# Altium PCB FlightController.PcbDoc (part 2 of 2)
Units mm, origin at the board's own origin, x right, y up, seen from the top; angles counter-clockwise.
Board outline 33 x 33 mm, 4 copper layers (Top Layer, Layer 2, Layer 3, Bottom Layer), stack 0.603 mm thick; 72 components, 55 nets, 323 pads, 114 vias.
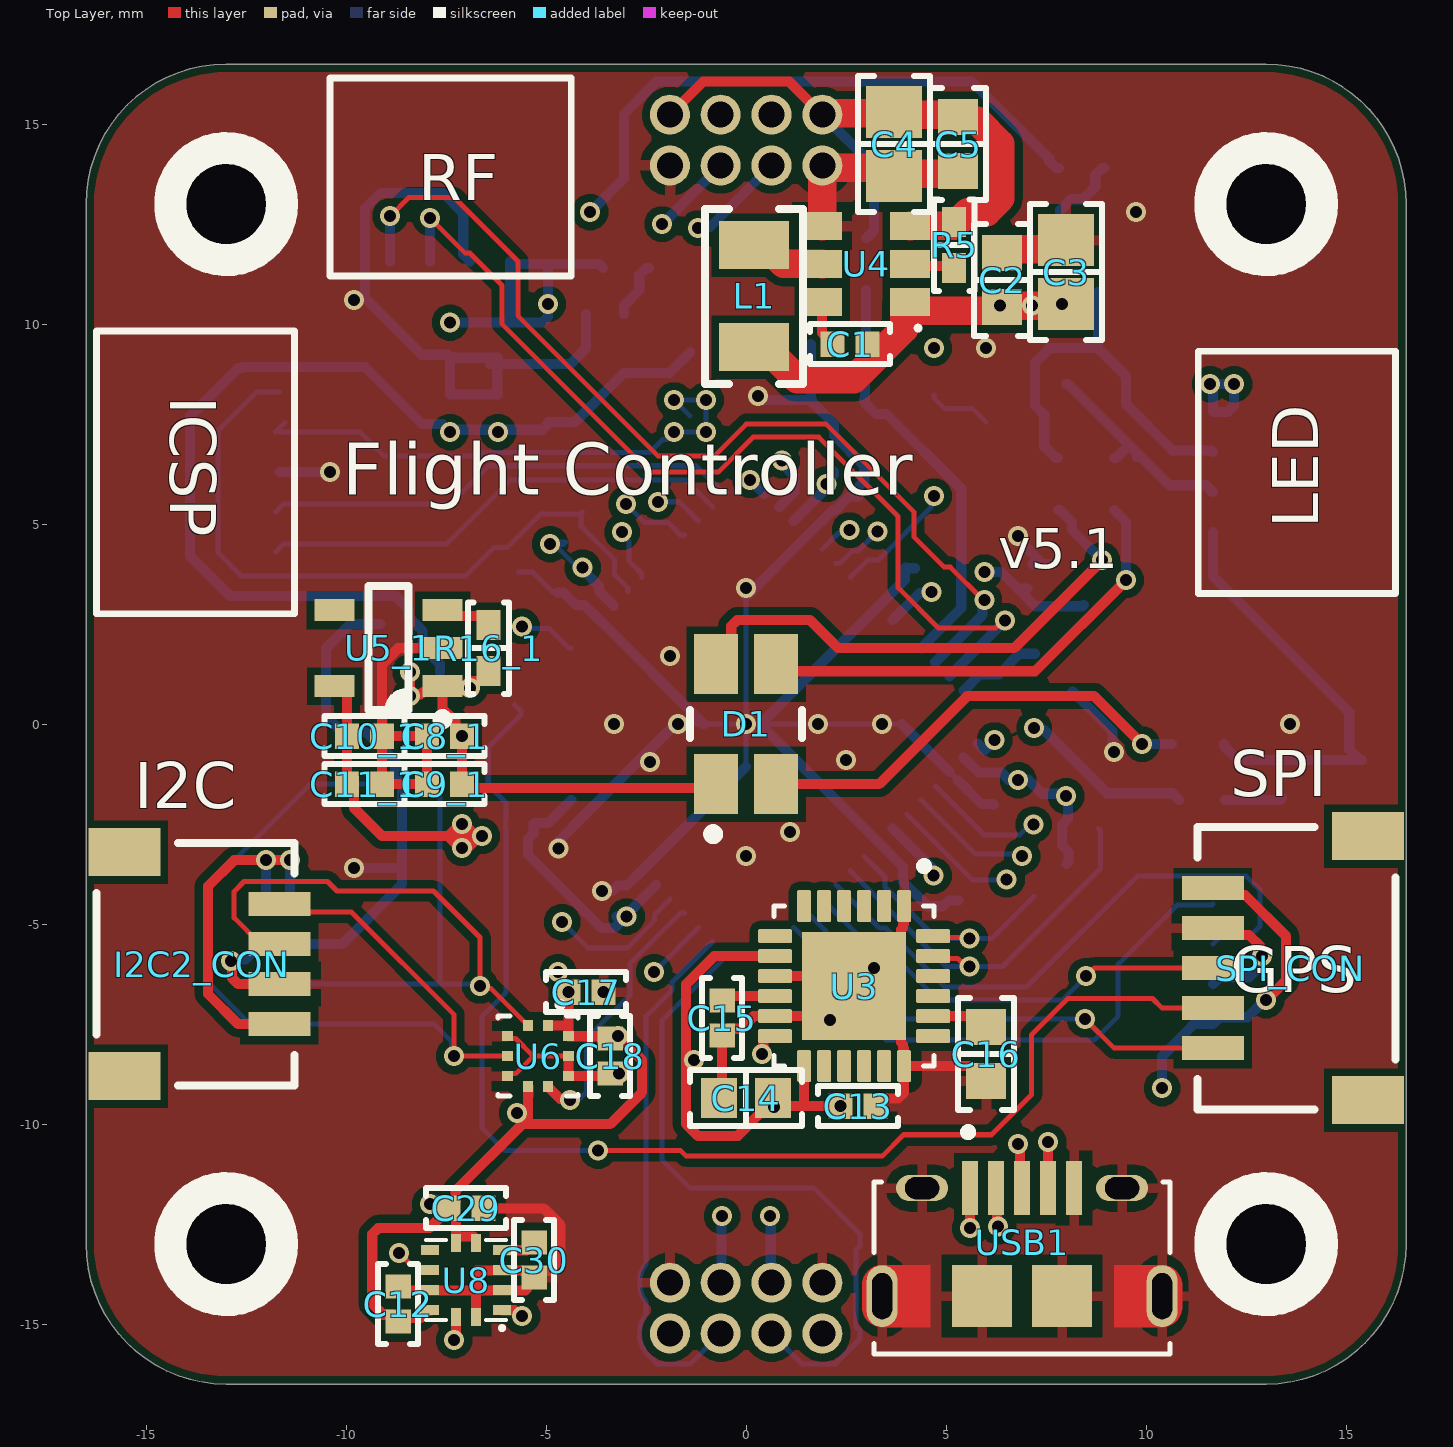
[diagram p0: Top Layer view]

## Via types
v1: diameter 0.5, hole 0.3, Top Layer to Bottom Layer, tented both sides, 114 vias

## Nets (pads, with @x,y where several pads share a name; then routed paths per layer and width w, separated by ;. In a path a pad name is that pad's centre, name@x,y a point inside that pad or via, vN(x,y) a via of type N, cw(c..) or ccw(c..) an arc to the next point about the centre after c; other vN are vias at no path point) (continued)
I2C.SDA: (continued)
  Bottom Layer w0.127: U7.3 -10.9,-1.5 -13.4,-4 -13.4,-6.5 -12.4,-7.5 -7.8,-7.5 -7.362,-7.938 -7.362,-8.238 v1(-7.3,-8.3) ; U1.41 3.469,-3.823 3.469,-4.069 4.76,-5.36 v1(5.587,-5.36) ; v1@5.623,-5.323 5.66,-5.36 6.14,-5.36 R1.1
INT.INT_LIS3: U1.53 U8.8 | length 15.6
  Top Layer w0.127: v1(-8.68,-13.225) -8.67,-13.225 -8.399,-13.496 -8.271,-13.496 -8.179,-13.588 -7.962,-13.588 U8.8
  Layer 2 w0.127: v1(-8.68,-13.225) -8.68,-7.08 -6.548,-4.948 v1(-4.6,-4.948)
  Bottom Layer w0.127: v1(-4.6,-4.948) -3.948,-5.6 -2.981,-5.6 -2.287,-4.906 -2.287,-4.762 U1.53
INT.INT_MPU: U1.51 U3.12 | length 5.9
  Top Layer w0.254: v1(0.4,-8.25) 0.428,-8.222 0.428,-7.848 0.476,-7.8 U3.12
  Layer 2 w0.127: v1(-2.3,-6.2) -1.65,-6.2 v1(0.4,-8.25)
  Bottom Layer w0.127: v1(-2.3,-6.2) -2.3,-6.195 -1.191,-5.086 U1.51
MCLR: C25.1 ICSP.1 R11.1 U1.9 | length 17.4
  Bottom Layer w0.127: ICSP.1 -12.243,8.3 -13.2,7.343 -13.2,4.284 -12.616,3.7 -7.022,3.7 C25.1 -5.977,4.411 -5.134,5.254 -4.146,5.254 R11.1@-4.123,5.277 ; R11.1 R11.1@-4.123,5.277 ; U1.9 -2.959,3.407 -3.287,3.735 -3.287,4.106 -4.123,4.942 R11.1@-4.123,5.277
MCU_VDD: C7.2 C20.2 C21.2 C22.2 C23.2 C24.2 C26.2 C27.2 FB1.2 ICSP.2 R1.2 R2.2 R11.2 U1.8 U1.19 U1.26 U1.34 U1.39 U1.54 U1.60 Y1.4 | length 35.8
  Bottom Layer w0.127: ICSP.2@-11.768,7.3 ICSP.2@-11.532,7.536 ; ICSP.2 -9.65,7.3 -9.05,6.7 -6.662,6.7 -6.576,6.786 -2.414,6.786 -2.087,7.114 -1.986,7.114 v1(-1.8,7.3) -1.2,7.3 -1.1,7.4 v1(-1,7.3) v1(-1,8.1) v1(-1.8,8.1) FB1.2 ; R11.2@-4.671,4.493 -4.572,4.493 -4.519,4.546 -4.718,4.546 -4.771,4.493 R11.2 v1(-4.9,4.5) -4.8,4.5 -4.211,3.911 v1(-4.089,3.911)
  Bottom Layer w0.254: U1.60 -4.95,-2.475 -5.297,-2.475 C22.2 -5.311,-2.734 -5.454,-2.877 -5.454,-3.261 -3.615,-5.1 -3.3,-5.1 C21.2@-3.011,-4.811 ; v1(-4.089,3.911) -4.089,3.866 -3.682,3.46 -3.682,3.333 -3.313,2.963 U1.8 ; C21.2@-3.234,-4.811 C21.2@-3.011,-4.811 ; U1.54 -2.774,-4.542 -2.774,-4.552 -2.889,-4.666 -2.889,-4.711 v1(-2.989,-4.811) C21.2@-3.011,-4.811 ; U1.19 1.966,5.856 1.966,5.953 v1(2.013,6) ; v1@2,6 2,6.053 2.189,6.242 C7.2 ; U1.39 3.666,-2.61 4.689,-3.632 v1(4.689,-3.789) ; U1.26 4.335,3.275 4.597,3.275 v1(4.629,3.307) ; U1.34 5.438,-0.838 5.808,-1.207 6.385,-1.207 6.566,-1.389 C23.2 ; v1(5.954,3.802) 6.376,3.802 C27.2 ; v1(6.8,-1.4) C23.2 ; C27.2@7.034,3.389 C27.2 ; v1(8,-1.8) R2.2 ; R1.2 8.06,-3.44 8.06,-3.196 7.9,-3.036 7.9,-2.52 8.046,-2.374 8.046,-1.846 R2.2 ; Y1.4 8.406,2.947 7.231,2.947 C27.2 ; C23.2 7.056,-1.389 7.407,-1.74 7.94,-1.74 R2.2
NetC1_1: C1.1 U4.6 | length 1.2
  Top Layer w0.254: U4.6 1.9,9.78 2.16,9.52 C1.1
NetC15_1: C15.1 U3.10 | length 1.4
  Top Layer w0.254: C15.1 -0.49,-6.8 U3.10
NetC16_1: C16.1 U3.20 | length 1.4
  Top Layer w0.254: U3.20 5.725,-7.3 C16.1
NetC30_1: C30.1 U8.4 | length 0.9
  Top Layer w0.254: U8.4@-6.085,-13.157 -6.083,-13.155 -5.493,-13.155 -5.305,-12.967 C30.1@-5.285,-12.967
NetD1_2: D1.2 R8.2 | length 11.3
  Top Layer w0.254: D1.2 3.325,-1.5 5.525,0.7 8.7,0.7 v1(9.9,-0.5)
  Bottom Layer w0.254: v1(9.9,-0.5) R8.2
NetD1_3: D1.3 R10.2 | length 11.6
  Top Layer w0.254: D1.3 0.927,1.323 7.223,1.323 v1(9.5,3.6)
  Bottom Layer w0.254: R10.2 9.202,5.35 9.5,5.052 v1(9.5,3.6)
NetD1_4: D1.4 R12.2 | length 13.4
  Top Layer w0.254: D1.4 -0.37,1.88 -0.37,2.451 -0.222,2.6 1.6,2.6 2.3,1.9 6.7,1.9 v1(8.9,4.1)
  Bottom Layer w0.254: R12.2 7.85,5.35 8.148,5.052 8.148,4.852 v1(8.9,4.1)
NetL1_1: L1.1 U4.5 | length 1.9
  Top Layer w0.712: L1.1 0.475,11.975 0.944,11.506 1.894,11.506 U4.5
NetM1_1: M1.1 R9.1 | length 1.4
  Bottom Layer w0.254: R9.1 12.05,-1.9 13.35,-1.9 M1.1
NetM2_1: M2.1 R13.1 | length 1.6
  Bottom Layer w0.127: R13.1 4.7,8.15 4.963,7.887 5.663,7.887 M2.1
NetM3_1: M3.1 R14.1 | length 1.8
  Bottom Layer w0.254: M3.1 7.85,12.85 8.123,13.123 8.423,13.123 8.727,13.427 8.727,13.727 8.9,13.9 R14.1@8.962,13.9
NetR5_2: R5.2 U4.2 | length 1.1
  Top Layer w0.254: U4.2 4.15,11.45 5.15,11.45 R5.2
NetR16_1_1: R16_1.1 U5_1.3 | length 1.3
  Top Layer w0.254: U5_1.3 -7.442,2.702 -6.613,2.702 -6.44,2.529 R16_1.1
NetR16_2_1: R16_2.1 U5_2.3 | length 1.5
  Bottom Layer w0.254: U5_2.3 -3.05,10.475 -2.673,10.852 -2.673,11.227 -2.5,11.4 R16_2.1
OSC: U1.31 Y1.3 | length 2.2
  Bottom Layer w0.254: U1.31 5.438,0.838 5.848,1.248 6.321,1.248 6.832,1.759 Y1.3
PGC: ICSP.5 U1.15 | length 12
  Bottom Layer w0.127: ICSP.5@-11.768,4.3 -11.568,4.5 -7.5,4.5 -5.9,6.1 -1.504,6.1 U1.15
PGD: ICSP.4 U1.16 | length 12
  Bottom Layer w0.127: ICSP.4@-11.768,5.3 -11.568,5.5 -7.4,5.5 -6.441,6.459 -1.25,6.459 -0.578,5.788 U1.16
RF_DIN: RF.3 U1.30 | length 24.1
  Top Layer w0.127: v1(-7.9,12.65) -7.023,11.773 -6.905,11.773 -6.1,10.968 -6.1,10 -2.4,6.3 -0.7,6.3 0.173,7.173 1.818,7.173 3.8,5.191 3.8,3.409 4.809,2.4 6.235,2.4 6.422,2.587 v1(6.471,2.587)
  Bottom Layer w0.254: RF.3 v1(-7.9,12.65) ; U1.30 5.081,1.194 6.471,2.585 v1(6.471,2.587)
RF_DOUT: RF.4 U1.29 | length 24.2
  Top Layer w0.127: v1(-8.9,12.7) -8.437,13.163 -7.296,13.163 -5.7,11.568 -5.7,10.2 -2.2,6.7 -0.8,6.7 0,7.5 2,7.5 4.2,5.3 4.2,4.673 4.95,3.923 5.106,3.923 5.927,3.102 v1(5.954,3.102)
  Bottom Layer w0.254: RF.4 v1(-8.9,12.7) ; U1.29 5.906,2.724 5.906,3.055 v1(5.954,3.102)
RPM1: J1.6 U1.13 | length 14.6
  Layer 2 w0.127: v1(-3,5.5) -3,15.31 -2.248,16.062 -1.462,16.062 J1.6
  Bottom Layer w0.127: v1(-3,5.5) -2.536,5.036 -1.949,5.036 -1.639,4.727 U1.13
RPM2: J1.4 U1.14 | length 15.6
  Layer 3 w0.254: v1(-2.2,5.559) -3,6.359 -3,15.31 -2.248,16.062 -0.192,16.062 J1.4
  Bottom Layer w0.127: v1(-2.2,5.559) -1.67,5.559 U1.14
RPM3: J2.6 U1.49 | length 17
  Bottom Layer w0.127: U1.49 -2.1,-7.403 -2.1,-10.9 -1.4,-11.6 1.7,-11.6 2.847,-12.747 2.847,-13.044 2.749,-13.143 2.749,-15.07 2.847,-15.168 2.847,-15.372 2.221,-15.998 1.399,-15.998 J2.6
RPM4: J2.4 U1.50 | length 13.4
  Bottom Layer w0.127: -2.48,-15.74 -2.221,-15.998 -1.399,-15.998 J2.4 ; -2.48,-15.739 cw(c-2.39,-15.65) -2.493,-15.725 -2.514,-15.696 ccw(c-2.616,-15.771) -2.514,-15.695 cw(c-1.905,-15.235) -2.5,-14.757 -2.5,-14.443 cw(c-1.905,-13.965) -2.5,-13.487 -2.5,-7.3 -1.849,-6.649 -1.849,-6.445 U1.50
SPI.MISO: SPI_CON.4 U1.1 | length 32.6
  Top Layer w0.127: v1(-3.7,-10.663) -1.637,-10.663 -1.5,-10.8 3.4,-10.8 3.934,-10.266 6.134,-10.266 7.131,-9.269 7.131,-7.769 8.041,-6.859 10.159,-6.859 10.4,-7.1 SPI_CON.4
  Bottom Layer w0.127: U1.1 -5.629,0.325 -5.629,0.231 -6.447,-0.587 -6.447,-1.527 -6,-1.974 -6,-2.381 -6.013,-2.394 -6.013,-2.612 -6,-2.625 -6,-6.7 -6.6,-7.3 -6.6,-10.1 -6.037,-10.663 v1(-3.7,-10.663)
SPI.MOSI: SPI_CON.5 U1.45 | length 11.9
  Top Layer w0.127: v1(8.472,-7.372) 9.2,-8.1 SPI_CON.5
  Bottom Layer w0.127: U1.45 2,-5.182 2,-5.8 3.572,-7.372 v1(8.472,-7.372)
SPI.SCK: SPI_CON.3 U1.44 | length 11.2
  Top Layer w0.127: v1(8.5,-6.3) 8.705,-6.095 11.663,-6.095 SPI_CON.3
  Bottom Layer w0.127: U1.44 3.025,-5.5 3.4,-5.5 4.8,-6.9 7.9,-6.9 v1(8.5,-6.3)
USB_D+: U1.37 USB1.3 | length 11.7
  Top Layer w0.254: v1(6.8,-10.5) 6.847,-10.547 6.847,-11.547 USB1.3
  Layer 2 w0.127: v1(6.8,-10.5) 6.8,-10.4 7.1,-10.1 7.1,-3.536 6.9,-3.336 v1(6.9,-3.3)
  Bottom Layer w0.127: U1.37 4.378,-1.899 5.725,-3.246 6.846,-3.246 v1(6.9,-3.3)
USB_D-: U1.36 USB1.2 | length 15.2
  Top Layer w0.254: USB1.2 6.275,-11.625 6.275,-12.529 v1(6.3,-12.554)
  Layer 2 w0.127: v1(6.3,-12.554) 8.073,-10.781 8.073,-10.173 7.5,-9.6 7.5,-2.826 v1(7.187,-2.513)
  Bottom Layer w0.127: U1.36 5.959,-2.777 6.442,-2.777 6.827,-2.777 7.091,-2.513 v1(7.187,-2.513)
USB_ID: U1.38 USB1.4 | length 13.4
  Top Layer w0.254: v1(7.548,-10.448) 7.549,-10.449 USB1.4 USB1.4
  Layer 2 w0.127: v1(6.513,-3.884) 6.513,-3.985 6.754,-4.225 6.754,-9.546 6.2,-10.1 6.2,-10.8 6.452,-11.052 7.129,-11.052 7.51,-10.67 7.51,-10.485 v1(7.548,-10.448)
  Bottom Layer w0.127: U1.38 5.668,-3.9 6.497,-3.9 v1(6.513,-3.884)
VBAT: C4.2 C5.1 J1.2 J1.8 J2.2 J2.8 R3.2 R5.1 U4.3 | length 65.2
  Top Layer w0.254: J1.8 -1.078,16.062 1.078,16.062 J1.2
  Top Layer w0.712: J1.2 1.937,15.267 3.668,15.267 C4.2 3.762,15.237 5.238,15.237 5.394,15.081 5.78,15.081 6.356,14.505 6.356,13.145 6.011,12.8 5.544,12.8 R5.1@5.2,12.456 ; U4.3 4.106,12.456 R5.1@5.2,12.456 ; R5.1 R5.1@5.2,12.456
  Layer 2 w0.5: J2.8 2.001,-15.331 2.859,-15.331 3.053,-15.525 7.538,-15.525 11.175,-11.888 11.175,5.325 9.8,6.7 9.8,10.5 5.065,15.235 J1.2
  Layer 3 w0.254: J2.2 -1.078,-16.062 1.078,-16.062 J2.8
  Bottom Layer w0.254: J1.2 3.2,13.94 3.2,12.35 R3.2
VBAT_ADC: C6.1 R3.1 R4.2 U1.28 | length 10.6
  Bottom Layer w0.254: R4.2 R4.2@2.975,8.125 ; R3.1 3,9.525 C6.1 R4.2@2.975,8.125 ; U1.28 5.377,2.902 5.377,5.886 3.51,7.752 3.248,7.752 2.975,8.025 R4.2@2.975,8.125
VBUS: U1.33 USB1.1 | length 17.4
  Top Layer w0.254: v1(5.6,-12.6) USB1.1
  Layer 2 w0.127: v1(5.6,-12.6) 5.6,-12.635 6.071,-13.106 6.529,-13.106 8.4,-11.235 8.4,-10 7.827,-9.427 7.827,-2.427 7.4,-2 7.4,-1.2 6.654,-0.454 6.267,-0.454 v1(6.213,-0.4)
  Bottom Layer w0.254: U1.33 5.956,-0.653 5.961,-0.653 v1(6.213,-0.4)
pads on no net: GPS_CON.M I2C1_CON.M I2C2_CON.M ICSP.M LED.M RF.M SPI_CON.M U1.2 U1.3 U1.4 U1.6 U1.11 U1.12 U1.24 U1.27 U1.32 U1.47 U1.48 U1.56 U1.57 U1.58 U1.61 U1.62 U1.63 U1.64 U3.2 U3.3 U3.4 U3.5 U3.6 U3.7 U3.14 U3.15 U3.16 U3.17 U3.19 U3.21 U3.22 U5_1.4 U5_2.4 U7.4 U8.7 Y1.1

## Polygon pours and split planes (outlines as drawn)
5V on Layer 3 "5V_L03_P006" (solid, pour order 6): -16.5,16.5 -16.5,-16.5 16.5,-16.5 16.5,16.5
MCU_VDD on Layer 3 "MCU_VDD_L03_P004" (solid, pour order 4): -6.6,4.7 -2.5,8.8 2.9,8.8 8.7,3 8.7,-4 5.8,-6.9 0.9,-6.9 -0.4,-5.6 -3.4,-5.6 -6.6,-2.4
3V3_IMU on Layer 3 "3V3_IMU_L03_P002" (solid, pour order 2): -9.3,-13.488 -9.3,-7.8 -7.482,-5.982 -7.482,-2.236 -6.875,-1.629 -6.485,-1.629 -6.181,-1.933 -6.181,-2.819 -3.4,-5.6 -0.3,-5.6 3.004,-8.904 3.004,-10.584 1.084,-12.504 -6.716,-12.504 -8,-13.788 -9,-13.788
GND on Bottom Layer "GND_L04_P000" (solid, pour order 0): -16.5,16.5 -16.5,-16.5 16.5,-16.5 16.5,16.5
GND on Top Layer "GND_L01_P001" (solid, pour order 1): -16.5,16.5 -16.5,-16.5 16.5,-16.5 16.5,16.5
GND on Layer 2 "GND_L02_P005" (solid, pour order 5): -16.5,16.5 -16.5,-16.5 16.5,-16.5 16.5,16.5

## Silkscreen, mask and mechanical layers (free items; w line width, h text height)
Top Overlay:
  circle w0.8: c13,-13 r1.4
  circle w0.8: c-13,-13 r1.4
  circle w0.8: c13,13 r1.4
  circle w0.8: c-13,13 r1.4
  lines w0.17: -16.242,2.759 -11.291,2.759 -11.291,9.824 -16.242,9.824 -16.242,2.759 ; -10.4,11.2 -4.369,11.2 -4.369,16.151 -10.4,16.151 -10.4,11.2 ; 11.304,3.264 16.234,3.264 16.234,9.323 11.304,9.323 11.304,3.264
  text "RF" at -8.2,13.1 h1.15
  text "ICSP" at -14.4,8.2 h1.15 r270
  text "Flight Controller" at -10.1,5.733 h1.3
  text "LED" at 14.3,4.9 h1.15 r90
  text "v5.1" at 6.3,3.9 h1
  text "SPI" at 12.1,-1.8 h1.15
  text "I2C" at -15.3,-2.1 h1.15
  text "GPS" at 12.1,-6.7 h1.15
Bottom Overlay:
  circle w0.44: c13,-13 r1.31
  circle w0.44: c-13,-13 r1.31
  circle w0.44: c13,13 r1.31
  circle w0.44: c-13,13 r1.31
  text "+" at 3.95,14.783 h1
  text "-" at 3.95,13.45 h1
  text "MCLR" at -8.12,7.92 h0.7
  text "5V" at 10.68,7.52 h0.7
  text "3V3" at -8.82,6.92 h0.7
  text "B" at 10.68,6.52 h0.7
  text "GND" at -8.82,5.92 h0.7
  text "G" at 10.68,5.42 h0.7
  text "PGD" at -8.82,4.92 h0.7
  text "R" at 10.68,4.42 h0.7
  text "PGC" at -8.82,3.92 h0.7
  text "LED" at 15.2,1.4 h1.15
  text "ICSP" at -11.3,0.9 h1.15
  text "TX" at 10.68,-4.78 h0.7
  text "5V" at -9.22,-4.88 h0.7
  text "RX" at 10.68,-5.88 h0.7
  text "GND" at -8.52,-5.98 h0.7
  text "GND" at 10.68,-6.88 h0.7
  text "SCL" at -8.52,-6.98 h0.7
  text "5V" at 10.68,-7.88 h0.7
  text "SDA" at -8.52,-7.98 h0.7
  text "I2C" at -12,-10.8 h1.15
  text "GPS" at 15.3,-10.9 h1.15
  text "-" at -3.95,-13.45 h1 r180
  text "+" at -3.95,-14.783 h1 r180
Board:
  the board outline again, w0.127